# Altium PCB mcp.PcbDoc
Units mil, origin at the board's own origin, x right, y up, seen from the top; angles counter-clockwise.
Board outline 1180 x 2035 mil, 2 copper layers (Top Layer, Bottom Layer), stack 65.792 mil thick; 9 components, 5 nets, 24 pads, 1 vias.
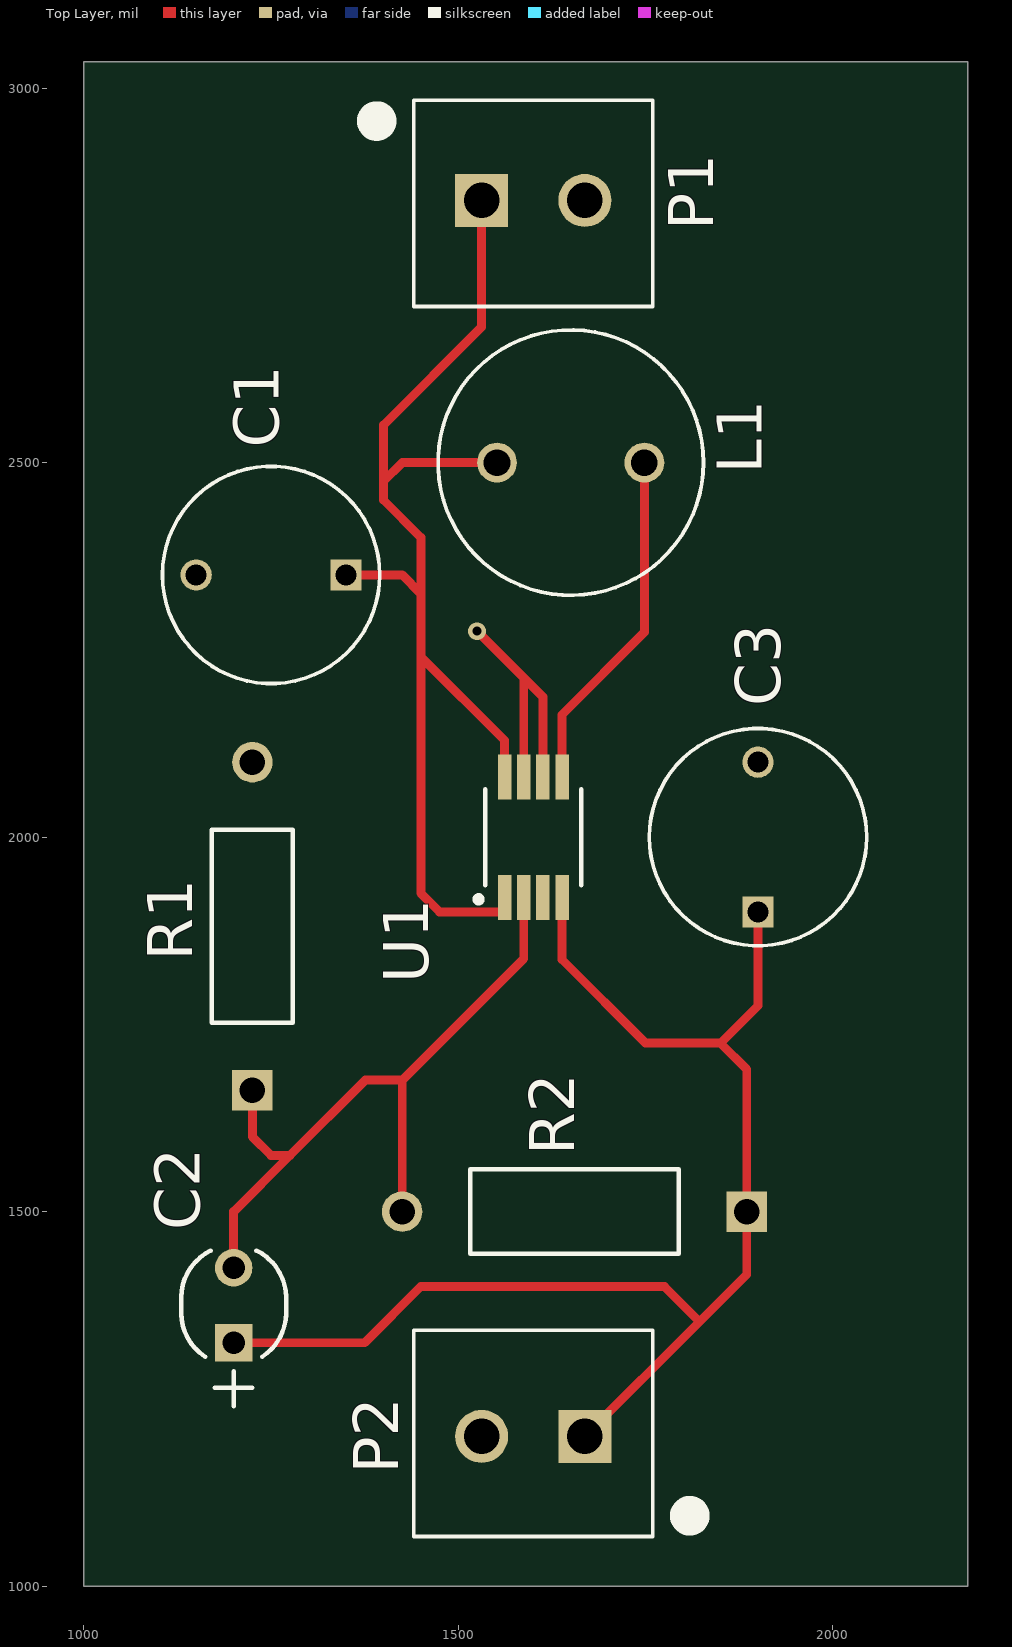
[diagram p0: Top Layer view]
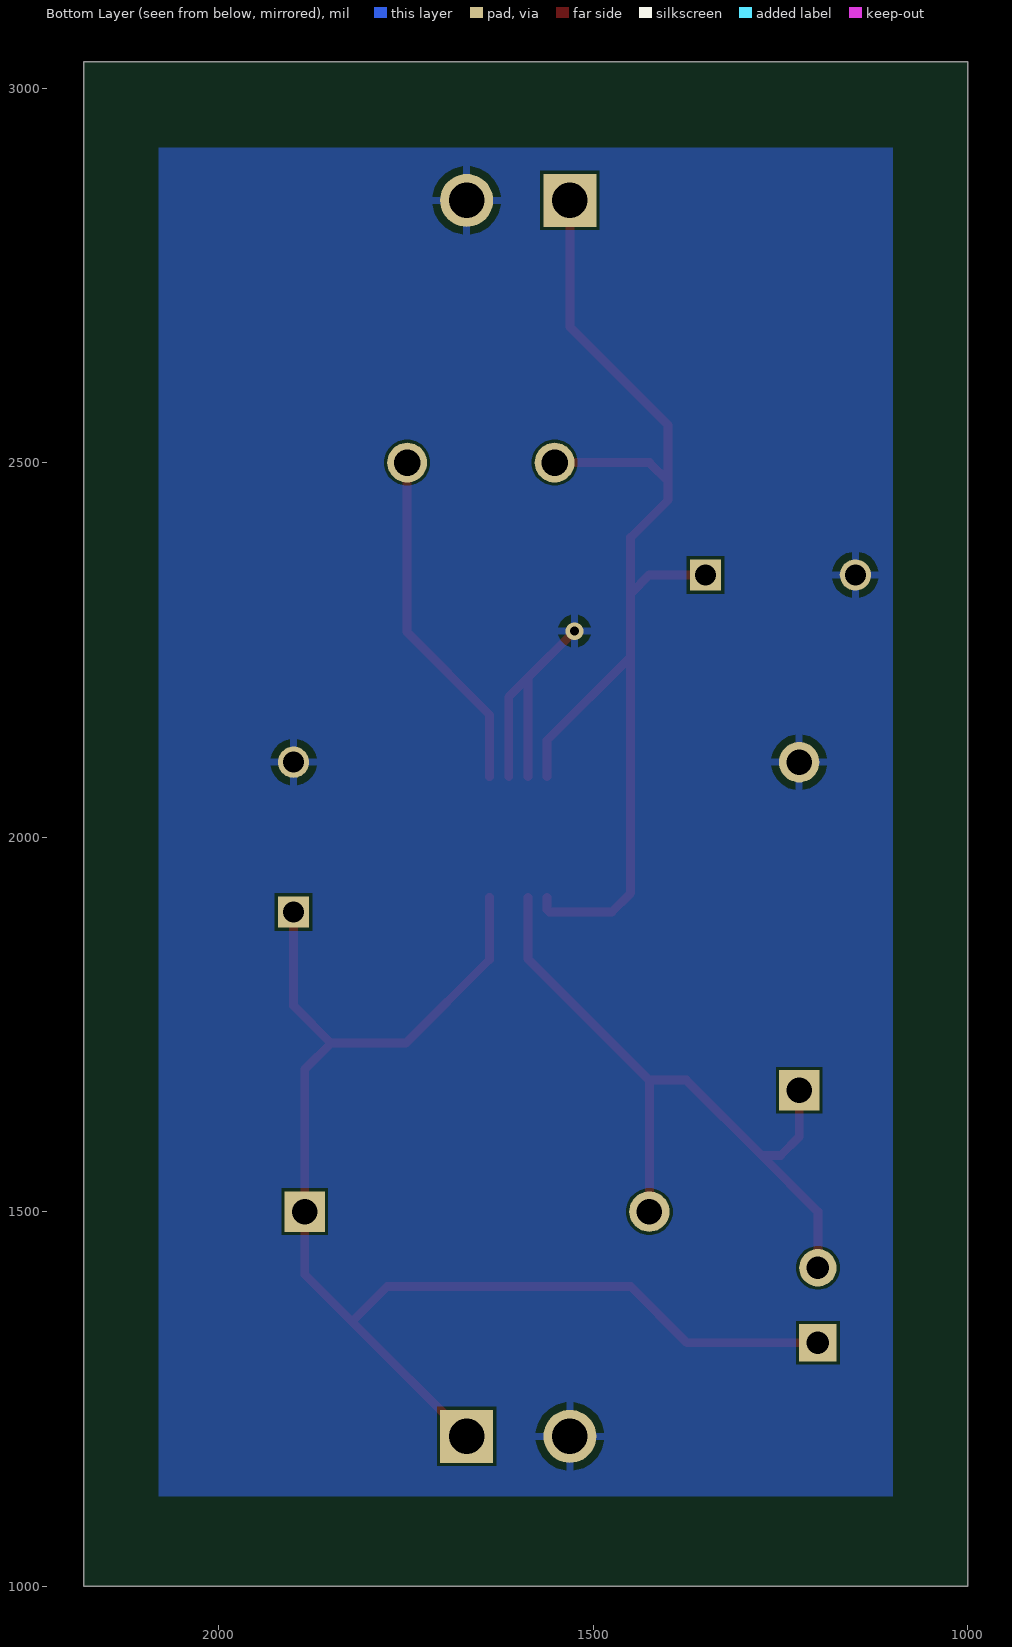
[diagram p1: Bottom Layer view, seen from below]
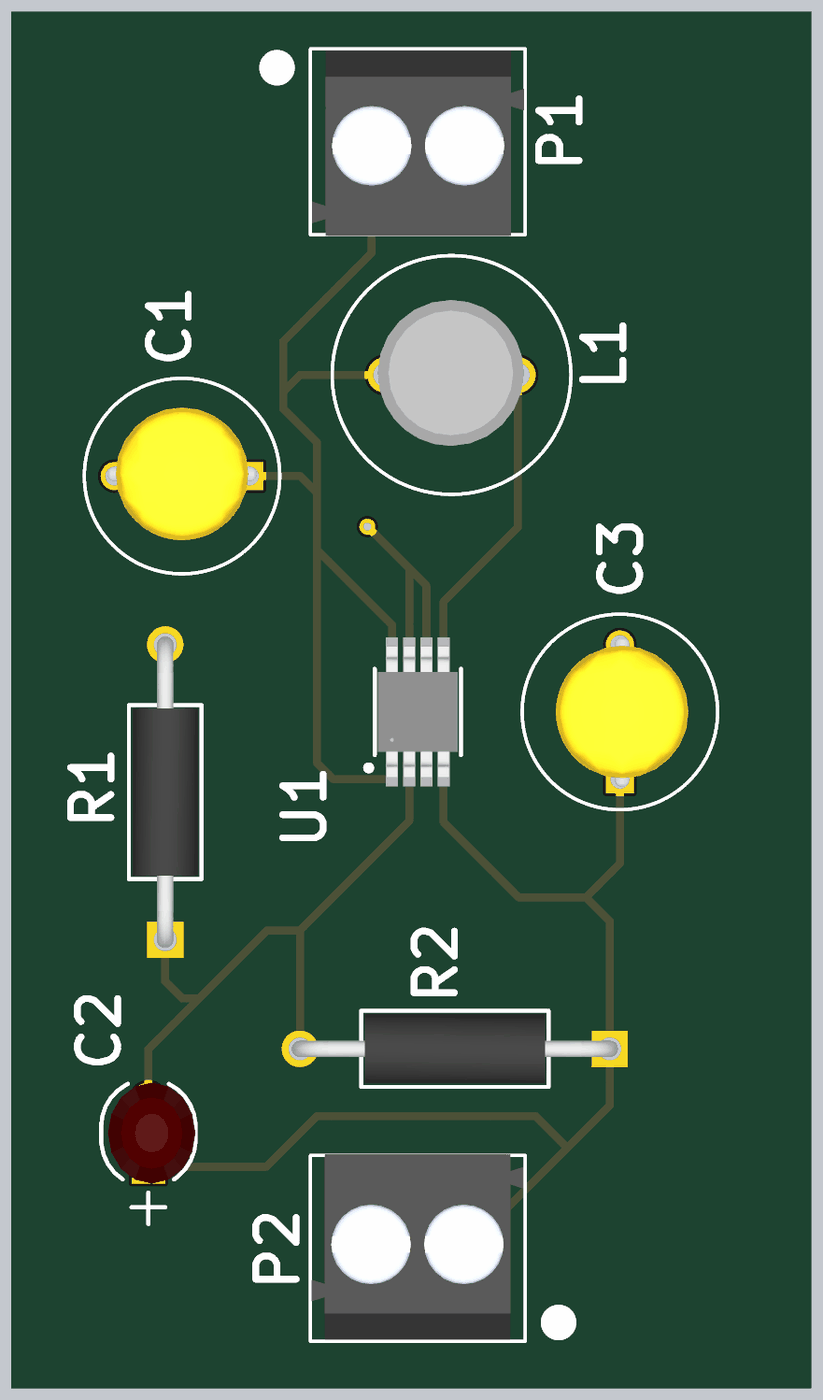
[diagram p2: 3D render of the assembled board from above, using the file's embedded part models]

## Layer stack, top to bottom
Top Solder: solder mask 0.4, Solder Resist, Dk 3.5
Top Layer: signal copper 1.4
Dielectric 1: dielectric 62.9921, FR-4, Dk 4.8
Bottom Layer: signal copper 1.4
Bottom Solder: solder mask 0.4, Solder Resist, Dk 3.5

## Board outline
1000,1000 2180,1000 2180,3035 1000,3035

## Design rules (kind name [scope] priority, off if disabled: settings)
Clearance [All] p1: gap=3.94 ignorepadtopadclearanceinfootprint=TRUE
MinimumSolderMaskSliver [All] p1: minsoldermaskwidth=3.94
PolygonConnect [All] p1: connectstyle=Relief reliefconductorwidth=10 reliefentries=4 polygonreliefangle="90 Angle" airgapwidth=10
RoutingVias [All] p1: holewidth=0.3 width=0.6 viastyle="Through Hole" minholewidth=0.3 minwidth=0.6 maxholewidth=0.3 maxwidth=0.6
SilkToSolderMaskClearance [IsPad] p1: minsilkscreentomaskgap=3.94 clearancetoexposedcopper=TRUE
SolderMaskExpansion [All] p1: expansion=4 istentingtop=FALSE
Width [All] p1: maxlimit=39.37 minlimit=11.81 preferedwidth=19.68
28 further rules are at their usual default settings.

## Components (designator, comment, footprint, x,y, rotation, side; value= is the part's Value field where it differs from the comment)
C1 "10uF" FB_28C0236-0JW-10 1250,2350 r180 top
C2 "10000 pF" CAP_C315_KEM 1200,1325 r90 top
C3 "10uF" FB_28C0236-0JW-10 1900,2000 r90 top
L1 "4.7uH" INDRD500W70D900H1220 1650,2500 r0 top
P1 "2x1 terminal block" OST_OSTTE020104 1600,2850 r0 top
P2 "2x1 terminal block" OST_OSTTE020104 1600,1200 r180 top
R1 "1,74 kΩ" RES_MRS25_VIS 1225,1662 r90 top
R2 "47kΩ" MOF1WS-47K 1885,1500 r180 top
U1 "MCP1643-I/MS" MSOP8_MC_MCH 1600,2000 r90 top

## Footprints (in the part's own frame and the unit in brackets; to place one, negate y for a bottom-side part, rotate by r counter-clockwise, add the part's x,y. Pads: shape width x height; smd on the part's side, far side on the other; paste and mask are expansions set on the pad)
CAP_C315_KEM [mil]
  rect 50x50 hole 30: 1(0,0)
  round 50 hole 30: 2(100,0)
  silkscreen extent -85,-70 123,70, body extent -25,-70 125,60, height 210
FB_28C0236-0JW-10 [mm]
  rect 1.06x1.06 hole 0.71: 1(-2.54,0)
  round 1.06 hole 0.71: 2(2.54,0)
  silkscreen extent -3.68,-3.68 3.68,3.68, body extent -2.82,-2.59 2.82,2.41, height 11.46
INDRD500W70D900H1220 [mm]
  round 1.35 hole 0.9: 1(-2.5,0) 2(2.5,0)
  silkscreen extent -4.5,-4.5 4.5,4.5, body extent -2.78,-2.67 2.72,2.83, height 7.51
MOF1WS-47K [mil]
  rect 54x54 hole 34 mask+0: 1(0,0)
  round 54 hole 34 mask+0: 2(460,0)
  silkscreen extent 91,-56 369,57, body extent -12,-51 472,51, height 103
MSOP8_MC_MCH [mil]
  rect 60x18 smd paste+0 mask+0: 1(-80.5,38.39) 2(-80.5,12.8) 3(-80.5,-12.8) 4(-80.5,-38.39) 5(80.5,-38.39) 6(80.5,-12.8) 7(80.5,12.8) 8(80.5,38.39)
  silkscreen extent -86,-64 64,76, body extent -96,-59 96,59, height 43
OST_OSTTE020104 [mm]
  rect 1.8x1.8 hole 1.2: 1(-1.75,0)
  round 1.8 hole 1.2: 2(1.75,0)
  silkscreen extent -5.48,-3.6 4.05,3.4, body extent -3.99,-3.65 4.01,3.35, height 8.31
RES_MRS25_VIS [mil]
  rect 54x54 hole 34 mask+0: 1(0,0)
  round 54 hole 34 mask+0: 2(438,0)
  silkscreen extent 90,-54 348,54, body extent -12,-49 450,49, height 98

## Part data
C1 C3: library part TAP106K010CCS, "Tantalum Capacitors - Solid Leaded 10V 10uF 10% ESR=5 Ohm", Case/Package=Dipped, ESR (Equivalent Series Resistance)=5R, Leakage Current=800nA, Manufacturer="Kyocera AVX", Max Operating Temperature=125°C, Min Operating Temperature=-55°C, Package Quantity=1000, Supplier Part Number 1=478-9320-ND, Tolerance=10%, Voltage Rating=10V, Capacitance=10uF, Category="Tantalum Capacitors", ComponentLink1Description=https://datasheet.ciiva.com/10693/tap-10693337.pdf?src-supplier=Avnet, ComponentLink1URL=https://datasheet.ciiva.com/10693/tap-10693337.pdf?src-supplier=Avnet, ComponentLink2Description=https://datasheet.ciiva.com/15162/getdatasheetpartid-29362-15162954.pdf?src-supplier=Verical, ComponentLink2URL=https://datasheet.ciiva.com/15162/getdatasheetpartid-29362-15162954.pdf?src-supplier=Verical, ComponentLink3Description=https://datasheet.ciiva.com/16493/tap-16493258.pdf?src-supplier=Future+Electronics, ComponentLink3URL=https://datasheet.ciiva.com/16493/tap-16493258.pdf?src-supplier=Future+Electronics, Construction=RADIAL, Diameter=5mm, Dissipation Factor=8%, Features="General Purpose", Height - Seated (Max)=0.394inch, Lead Diameter=0.5mm, Lead Free="Lead Free", Lead Pitch=5mm, Length=10mm, Life (Hours)=1000Hour, Manufacturer Part Number=TAP106K010CCS, Mount="Through Hole", Packaging=Bulk, Polarity=Polar, Pricing 1="1=0,75000, 10=0,52800, 50=0,39920, 100=0,34780, 500=0,25760, 1000=0,21896, 2500=0,20608, 5000=0,19320 (USD)", Radiation Hardening=No, RoHS=Yes, RoHS Compliant=Yes, Series=TAP, Stock 1=1597, Supplier 1=Digi-Key, Termination=Radial, Voltage Rating (DC)=10V
C2: library part C315C103K5R5TA, "10000 pF ±10% 50V Ceramic Capacitor X7R Radial", Mfr_Name=Kemet, Copyright="Copyright (C) 2022 Ultra Librarian. All rights reserved.", Digi-Key_Part_Number_1=399-4148-ND, Manufacturer_Part_Number=C315C103K5R5TA, RefDes=RefDes, Type=DEV
L1: library part COIL0608-0.0047, "Inductor: wire; THT; 4.7uH; Ioper: 5A; 22.94mΩ; ±20%; Ø7.5x9.5mm"
P1 P2: library part OSTTE020104, "2 Position Wire to Board Terminal Block Horizontal with Board 0.138 _3.50mm_ Through Hole", Package=None, Digi-Key_Part_Number=ED2740-ND, Digi-Key_Purchase_URL=https://www.digikey.com/product-detail/en/on-shore-technology-inc/OSTTE020104/ED2740-ND/2351816?utm_source=snapeda&utm_medium=aggregator&utm_campaign=symbol, MF="On Shore", MP=OSTTE020104, SnapEDA_Link=https://www.snapeda.com/parts/OSTTE020104/On%20Shore%20Technology%20Inc./view-part/274621/?ref=snap
R1: library part MRS25000C1741FCT00, "1.74 kOhms ±1% 0.6W Through Hole Resistor Axial Metal Film", Mfr_Name=Vishay, Copyright="Copyright (C) 2022 Ultra Librarian. All rights reserved.", Digi-Key_Part_Number_1=MRS25000C1741FCT00-ND, Digi-Key_Part_Number_2=56-MRS25000C1741FCT00CT-ND, Digi-Key_Part_Number_3=56-MRS25000C1741FCT00TB-ND, Manufacturer_Part_Number=MRS25000C1741FCT00, RefDes=RefDes, Type=DEV
R2: library part MOF1WS-47K, "Resistor: metal oxide; THT; 47kΩ; 1W; ±5%; Ø3.2x9mm; axial", Copyright="Copyright (C) 2022 Ultra Librarian. All rights reserved.", Manufacturer_Part_Number=MOF1WS-47K, Mfr_Name=MOF1WS-47K
U1: "Switching Voltage Regulators 0.65V-5V input LED Driver", Mfr_Name=Microchip, Copyright="Copyright (C) 2022 Ultra Librarian. All rights reserved.", Digi-Key_Part_Number_1=MCP1643-I/MS-ND, Manufacturer_Part_Number=MCP1643-I/MS, RefDes=RefDes, Type=DEV

## Via types
v1: diameter 23.62, hole 11.81, Top Layer to Bottom Layer, 1 vias

## Nets (pads, with @x,y where several pads share a name; then routed paths per layer and width w, separated by ;. In a path a pad name is that pad's centre, name@x,y a point inside that pad or via, vN(x,y) a via of type N, cw(c..) or ccw(c..) an arc to the next point about the centre after c; other vN are vias at no path point)
GND: C1.2 C3.2 P1.2 P2.2 R1.2 U1.6 U1.7 | length 363.2
  Top Layer w11.81: v1(1525,2275) 1587.2,2212.8 ; U1.7 1587.2,2212.8 ; U1.6 1612.8,2187.2 1587.2,2212.8
SW: L1.2 U1.5 | length 465.1
  Top Layer w11.81: U1.5 1638.39,2163.39 1748.43,2273.43 L1.2
VFB: C2.2 R1.1 R2.2 U1.2 | length 981.8
  Top Layer w11.81: C2.2 1200,1500 1275,1575 ; R1.1 1225,1600 1250,1575 1275,1575 ; R2.2 1425,1675.59 ; U1.2 1587.2,1837.8 1425,1675.59 ; 1275,1575 1375.59,1675.59 1425,1675.59
VIN: C1.1 L1.1 P1.1 U1.1 U1.8 | length 1618.7
  Top Layer w11.81: C1.1 1425,2350 1450,2325 ; P1.1 1531.1,2681.1 1400,2550 1400,2475 ; L1.1 1425,2500 1400,2475 ; U1.1 1561.61,1903.09 1558.52,1900 1475,1900 1450,1925 1450,2241 ; U1.8 1561.61,2129.39 1450,2241 ; 1400,2475 1400,2450 1450,2400 1450,2325 ; 1450,2241 1450,2325
VOUT: C2.1 C3.1 P2.1 R2.1 U1.4 | length 1837.9
  Top Layer w11.81: C2.1 1375,1325 1450,1400 1775,1400 1821.95,1353.05 ; U1.4 1638.39,1836.61 1750,1725 1850,1725 ; P2.1 1821.95,1353.05 ; C3.1 1900,1775 1850,1725 ; 1821.95,1353.05 1885,1416.1 R2.1 1885,1690 1850,1725
pads on no net: U1.3

## Polygon pours and split planes (outlines as drawn)
GND on Bottom Layer "GND_L02_P001" (solid, pour order 1): 1100,2920 2080,2920 2080,1120 1100,1120

## Silkscreen, mask and mechanical layers (free items; w line width, h text height)
Board:
  the board outline again, w7.87

## Text inside footprints (layer, text, board x,y; h text height)
U1: Mechanical 13 "*" at 1594,1943.5 h50 r90